# Altium PCB Part1_PCB.PcbDoc
Units mm, origin at the board's own origin, x right, y up, seen from the top; angles counter-clockwise.
Board outline 92.48 x 99.75 mm, 2 copper layers (Top Layer, Bottom Layer); 8 components, 6 nets, 45 pads, 34 vias.
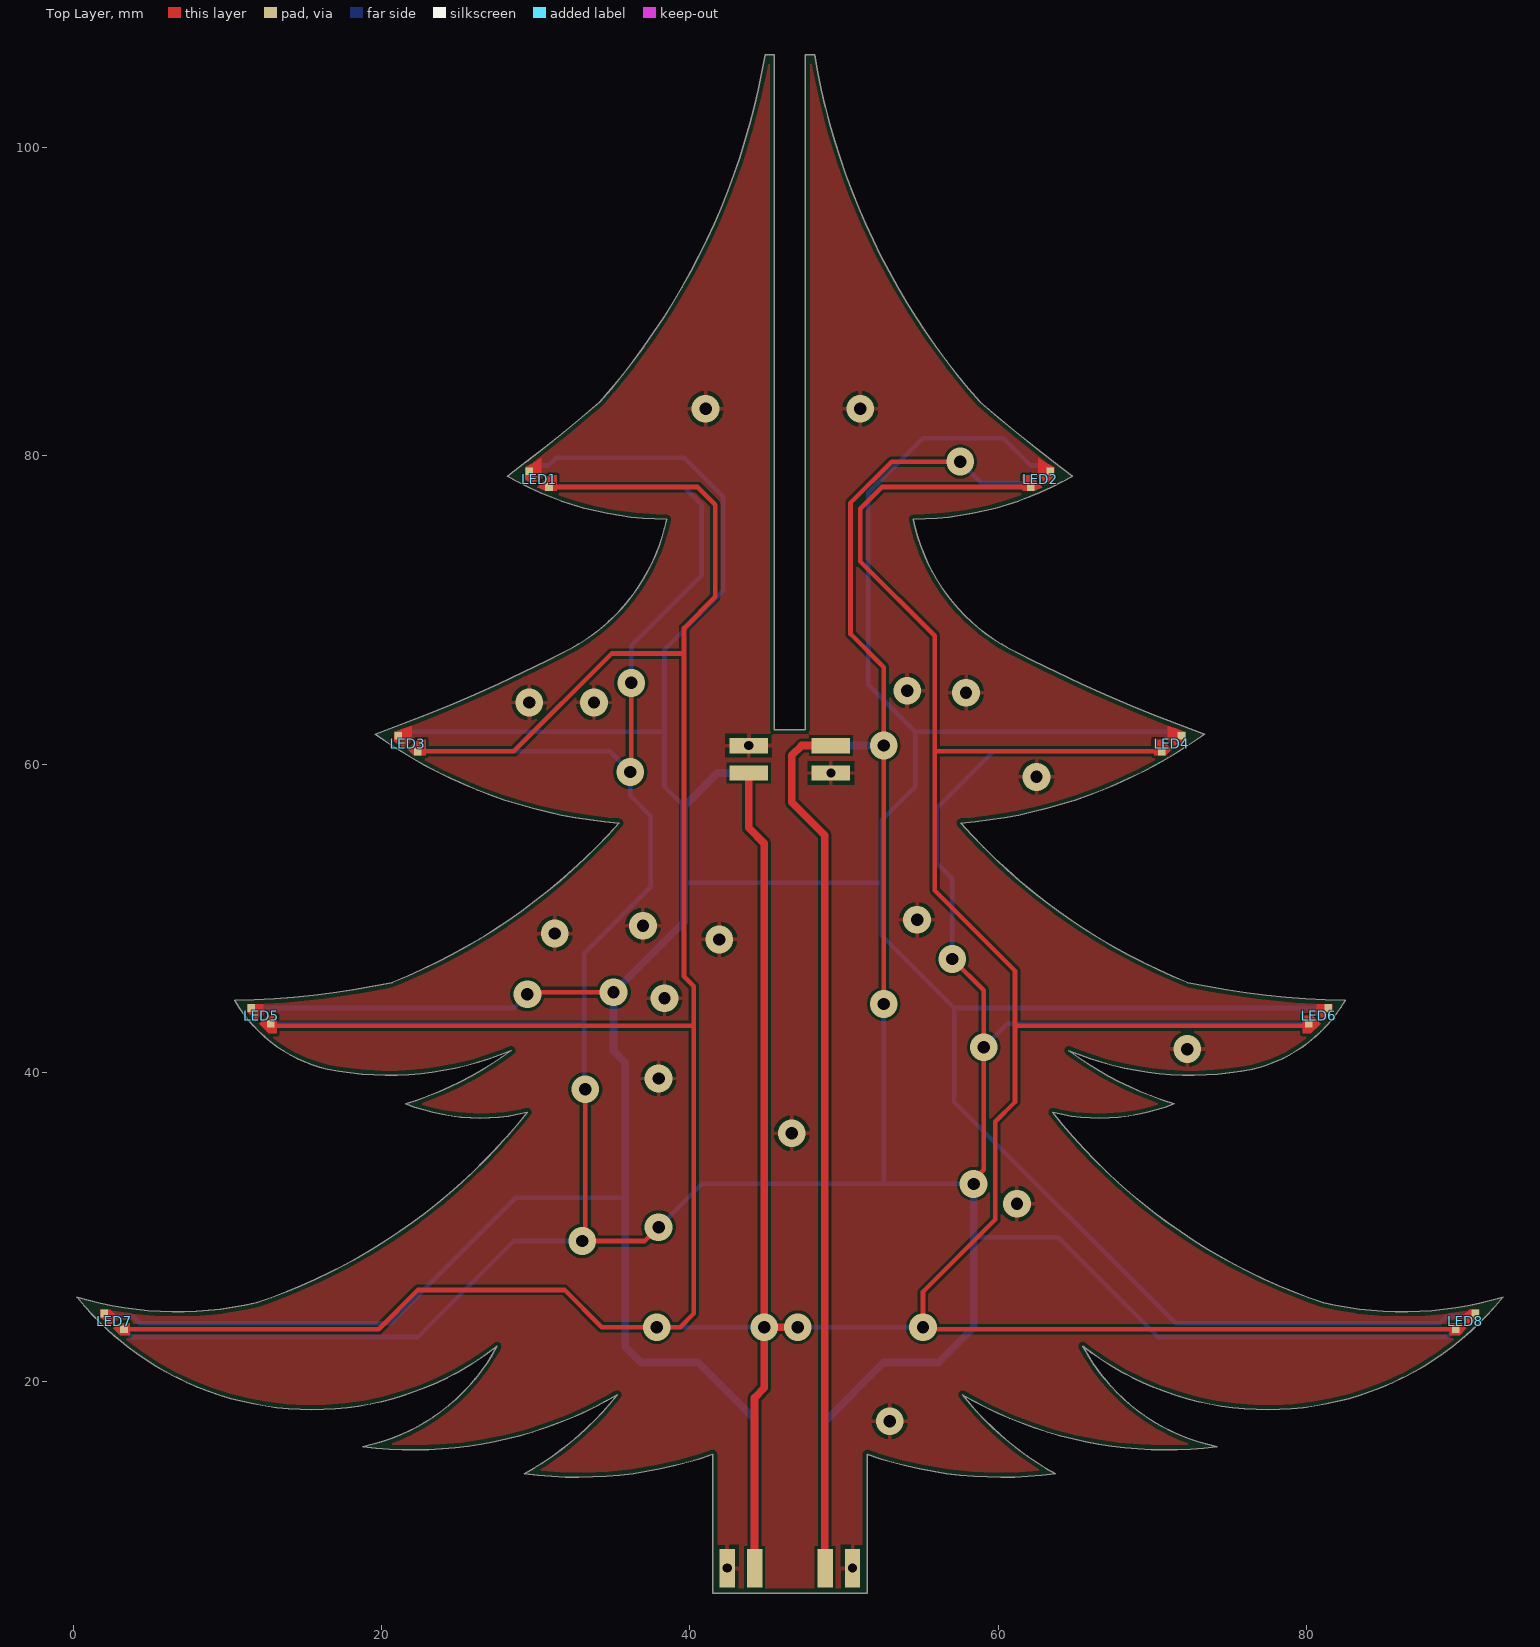
[diagram p0: Top Layer view]
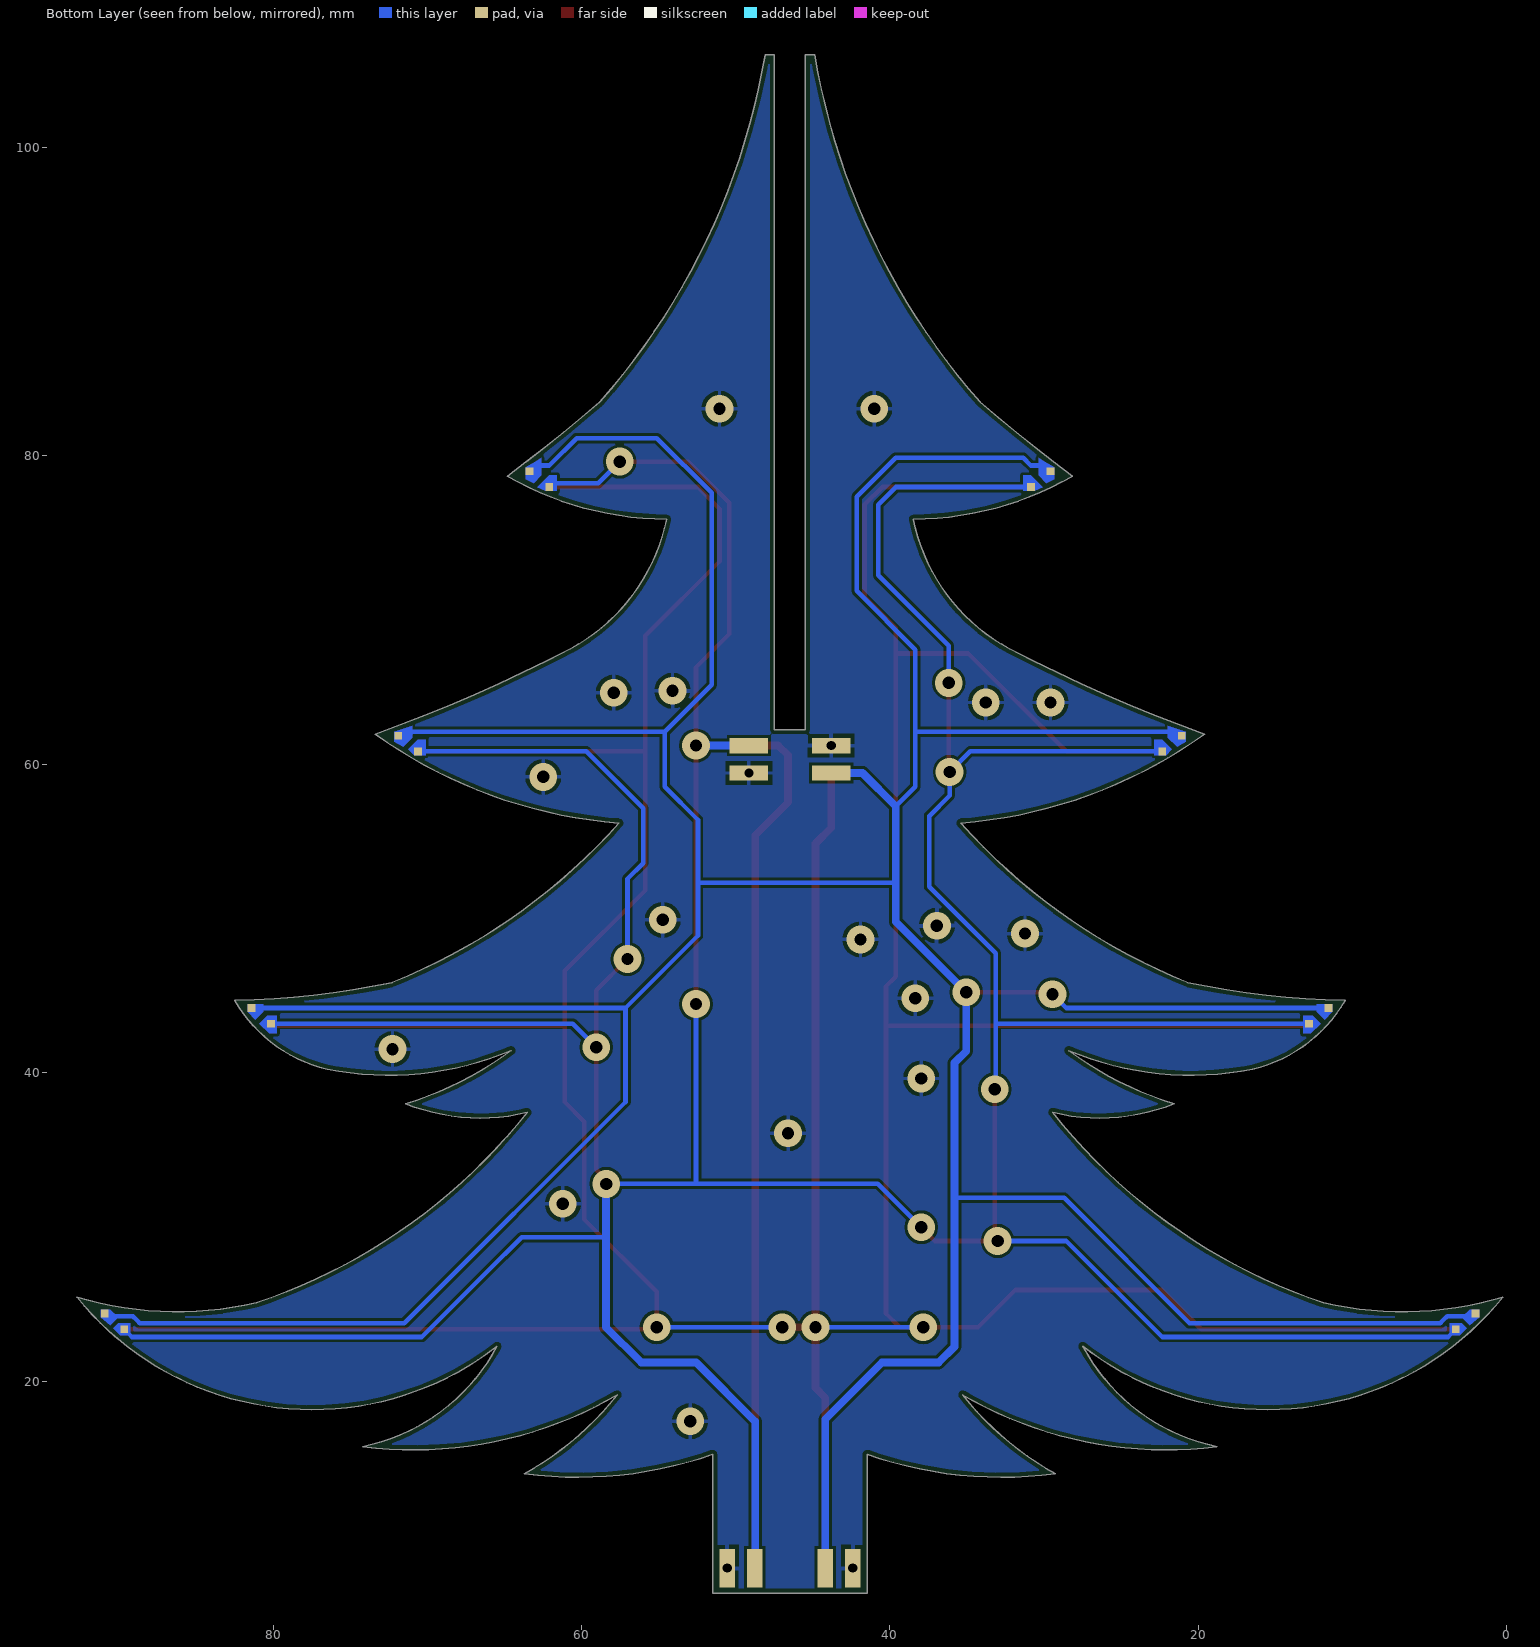
[diagram p1: Bottom Layer view, seen from below]

## Layer stack, top to bottom
Top Solder: solder mask 0.0102, Solder Resist, Dk 3.5
Top Layer: signal copper 0.0356
Dielectric 1: dielectric 0.32, FR-4, Dk 4.8
Bottom Layer: signal copper 0.0356
Bottom Solder: solder mask 0.0102, Solder Resist, Dk 3.5

## Board outline
0.25,25.447 ccw(c6.774,47.36) 11.884,25.074 ccw(c-0.116,60.815) 29.448,37.42 cw(c26.398,50.077) 21.571,37.985 ccw(c14.857,59.803) 28.411,41.435 cw(c20.471,60.239) 16.482,40.221 cw(c18.703,49.473) 10.48,44.687 ccw(c9.289,100.647) 20.685,45.847 ccw(c6.064,82.315) 35.405,56.184 cw(c37.894,87.548) 19.596,61.953 ccw(c-15.244,158.773) 32.278,67.506 ccw(c26.422,78.334) 38.488,75.898 cw(c38.543,96.629) 28.164,78.684 ccw(c-42.298,172.702) 34.154,83.486 ccw(c0.068,113.534) 44.879,106.003 45.489,106 45.489,62.25 47.489,62.25 47.489,106 48.096,106 ccw(c92.903,113.538) 58.825,83.486 ccw(c135.275,172.7) 64.814,78.684 cw(c54.435,96.629) 54.49,75.898 ccw(c66.556,78.334) 60.7,67.506 ccw(c108.223,158.773) 73.382,61.953 cw(c55.084,87.548) 57.574,56.183 ccw(c86.914,82.315) 72.293,45.847 ccw(c83.689,100.646) 82.498,44.687 cw(c74.275,49.473) 76.496,40.221 cw(c72.507,60.239) 64.567,41.435 ccw(c78.121,59.804) 71.408,37.985 cw(c66.581,50.077) 63.53,37.42 ccw(c93.095,60.815) 81.094,25.074 ccw(c86.204,47.36) 92.728,25.447 cw(c77.481,37.72) 65.489,22.25 ccw(c76.752,28.246) 74.182,15.748 cw(c70.871,41.683) 57.695,19.1 ccw(c73.306,31.397) 63.705,13.998 cw(c60.2,40.023) 51.489,15.25 51.489,6.25 41.489,6.25 41.489,15.25 cw(c32.778,40.023) 29.274,13.998 ccw(c19.672,31.397) 35.283,19.1 cw(c22.107,41.683) 18.796,15.748 ccw(c16.226,28.246) 27.489,22.25 cw(c15.498,37.72)
cut-out: 0,0 0.254,0 0.254,0.254 0,0.254

## Design rules (kind name [scope] priority, off if disabled: settings)
BoardOutlineClearance [All] p1: gap=0.2 ignorepadtopadclearanceinfootprint=FALSE
Clearance [All] p1: gap=0.2 ignorepadtopadclearanceinfootprint=FALSE
FanoutControl Fanout_LCC [All] p1 off: bgadir=Out bgaviamode=Centered fanoutstyle=Auto fanoutdirection=Alternating viagrid=0.025 // Protel DXP Scope 1 Expression Was: IsLCC   Fanout_LCC (Default Rule)
FanoutControl Fanout_BGA [All] p2 off: bgadir=Out bgaviamode=Centered fanoutstyle=Auto fanoutdirection=Alternating viagrid=0.025 // Protel DXP Scope 1 Expression Was: IsBGA   Fanout_BGA (Default Rule)
FanoutControl Fanout_SOIC [All] p3 off: bgadir=Out bgaviamode=Centered fanoutstyle=Auto fanoutdirection=Alternating viagrid=0.025 // Protel DXP Scope 1 Expression Was: IsSOIC   Fanout_SOIC (Default Rule)
FanoutControl Fanout_Default [All] p4: bgadir=Out bgaviamode=Centered fanoutstyle=Auto fanoutdirection=Alternating viagrid=0.025 // Fanout_Default (Default Rule)
FanoutControl Fanout_Small [All] p5 off: bgadir=Out bgaviamode=Centered fanoutstyle=Auto fanoutdirection=Alternating viagrid=0.025 // Protel DXP Scope 1 Expression Was: (CompPinCount < 5)   Fanout_Small (Default Rule)
PolygonConnect [All] p1: connectstyle=Relief reliefconductorwidth=0.254 reliefentries=4 polygonreliefangle="90 Angle" airgapwidth=0.254
RoutingVias [All] p1: holewidth=0.8 width=1.8 viastyle="Through Hole" minholewidth=0.8 minwidth=1.8 maxholewidth=0.8 maxwidth=1.8
SilkToSolderMaskClearance [All] p1 off: minsilkscreentomaskgap=0.254 clearancetoexposedcopper=TRUE // Protel DXP Scope 1 Expression Was: IsPad
SolderMaskExpansion [All] p1: expansion=0.102 istentingtop=FALSE
Width [All] p1: maxlimit=1 minlimit=0.3 preferedwidth=0.5
24 further rules are at their usual default settings.

## Components (designator, comment, footprint, x,y, rotation, side; value= is the part's Value field where it differs from the comment)
LED1 "1010" LED_RGB_2_LAYERS#1 29.591,78.994 r0 top
LED2 "1010" LED_RGB_2_LAYERS#2 63.373,78.994 r180 top
LED3 "1010" LED_RGB_2_LAYERS#1 21.082,61.849 r0 top
LED4 "1010" LED_RGB_2_LAYERS#2 71.882,61.849 r180 top
LED5 "1010" LED_RGB_2_LAYERS#1 11.557,44.196 r0 top
LED6 "1010" LED_RGB_2_LAYERS#2 81.407,44.196 r180 top
LED7 "1010" LED_RGB_2_LAYERS#1 2.032,24.384 r0 top
LED8 "1010" LED_RGB_2_LAYERS#2 90.932,24.384 r180 top

## Footprints (in the part's own frame and the unit in brackets; to place one, negate y for a bottom-side part, rotate by r counter-clockwise, add the part's x,y. Pads: shape width x height; smd on the part's side, far side on the other; paste and mask are expansions set on the pad)
LED_RGB_2_LAYERS#1 [mm]
  rect 0.5x0.5 smd: 1(0,0) 2(1.27,-1.016)
  rect 0.5x0.5 smd far side: 3(0,0) 4(1.27,-1.016)
LED_RGB_2_LAYERS#2 [mm]
  rect 0.5x0.5 smd: 1(0,0) 2(1.27,1.016)
  rect 0.5x0.5 smd far side: 3(0,0) 4(1.27,1.016)

## Part data
LED1 LED2 LED3 LED4 LED5 LED6 LED7 LED8: library part LED-RGB, Name=1010

## Free pads (board coordinates)
  rect 1x2.5 hole 0.6: ""(42.418,7.874) ""(50.546,7.874)
  rect 2.5x1 smd far side: ""(43.815,59.436) ""(49.149,61.214)
  rect 2.5x1 smd: ""(43.815,59.436) ""(49.149,61.214)
  rect 2.5x1 hole 0.6: ""(43.815,61.214) ""(49.149,59.436)
  rect 1x2.5 smd far side: ""(44.196,7.874) ""(48.768,7.874) ""(50.546,7.874)
  rect 1x2.5 smd: ""(44.196,7.874) ""(48.768,7.874)

## Via types
v1: diameter 1.8, hole 0.8, Top Layer to Bottom Layer, tented both sides, 34 vias

## Nets (pads, with @x,y where several pads share a name; then routed paths per layer and width w, separated by ;. In a path a pad name is that pad's centre, name@x,y a point inside that pad or via, vN(x,y) a via of type N, cw(c..) or ccw(c..) an arc to the next point about the centre after c; other vN are vias at no path point)
+5V: LED1.1 LED2.1 LED3.1 LED4.1 LED5.1 LED6.1 LED7.1 LED8.1 pad.@42.418,7.874 pad.@43.815,61.214 pad.@49.149,59.436 pad.@50.546,7.874
  other v1: 52.959,17.399 61.214,31.496 46.609,36.068 37.973,39.624 72.263,41.529 38.354,44.831 41.91,48.641 31.242,49.022 36.957,49.53 54.737,49.911 62.484,59.182 29.591,64.008 33.782,64.008 57.912,64.643 54.102,64.77 41.021,83.058 51.054,83.058
BLUE: LED1.4 LED2.4 LED3.4 LED4.4 LED5.4 LED6.4 LED7.4 LED8.4 pad.@48.768,7.874 pad.@49.149,61.214 | length 346.9
  Top Layer w0.3: v1(33.21,38.925) 33.21,29.273 v1(33.02,29.083) 37.084,29.083 v1(37.973,29.972) ; v1(36.131,59.499) 36.195,59.563 v1(36.195,65.278) ; v1(52.578,44.45) v1(52.578,61.214) 52.578,66.294 50.422,68.45 50.422,70.736 50.419,70.739 50.419,76.962 53.086,79.629 v1(57.531,79.629) ; v1(57.023,47.371) 59.055,45.339 v1(59.055,41.656) 59.055,33.711 58.401,33.057 v1(58.401,32.785)
  Bottom Layer w0.3: LED7.4 3.81,22.86 22.352,22.86 28.575,29.083 v1(33.02,29.083) ; LED5.4 33.147,43.18 ; LED3.4 34.798,60.833 v1(36.131,59.499) 36.131,57.975 37.465,56.642 37.465,52.07 33.147,47.752 33.147,43.18 ; LED1.4 39.624,77.978 40.767,76.835 40.767,72.263 36.195,67.691 v1(36.195,65.278) ; v1(33.21,38.925) 33.147,38.989 33.147,43.18 ; v1(37.973,29.972) 40.786,32.785 52.578,32.785 ; v1(52.578,44.45) 52.578,32.785 ; v1(57.023,47.371) 57.023,52.578 56.007,53.594 56.007,57.15 59.69,60.833 LED4.4 ; v1(57.531,79.629) 58.928,78.232 61.849,78.232 ; v1(58.401,32.785) 52.578,32.785 ; 58.42,29.337 63.881,29.337 66.167,27.051 70.358,22.86 89.154,22.86 LED8.4 ; v1(59.055,41.656) 60.579,43.18 LED6.4
  Bottom Layer w0.5: pad.@48.743,8 48.743,17.374 52.578,21.209 56.134,21.209 58.42,23.495 58.42,29.337 58.42,32.766 v1(58.401,32.785) ; pad.@49.149,61.214 v1(52.578,61.214)
GND: 
GREEN: LED1.2 LED2.2 LED3.2 LED4.2 LED5.2 LED6.2 LED7.2 LED8.2 pad.@43.815,59.436 pad.@44.196,7.874 | length 360.8
  Top Layer w0.3: LED7.2 19.812,23.368 22.352,25.908 31.877,25.908 34.29,23.495 v1(37.846,23.495) 39.37,23.495 40.259,24.384 40.259,45.593 39.624,46.228 39.624,67.183 ; LED5.2 12.927,43.08 13.076,43.08 13.103,43.053 40.132,43.053 ; LED3.2 28.575,60.833 34.925,67.183 39.624,67.183 ; LED1.2 40.513,77.978 41.656,76.835 41.656,70.866 39.624,68.834 39.624,67.183 ; LED2.2 52.451,77.978 51.054,76.581 51.054,73.152 55.88,68.326 55.88,60.833 ; LED4.2 55.88,60.833 ; LED6.2 80.037,43.08 79.888,43.08 79.861,43.053 61.087,43.053 ; LED8.2 55.245,23.368 v1(55.118,23.495) 55.118,25.781 59.817,30.48 59.817,36.83 61.087,38.1 61.087,43.053 ; 55.88,60.833 55.88,51.816 61.087,46.609 61.087,43.053
  Top Layer w0.5: pad.@43.815,59.436 43.815,55.88 44.831,54.864 v1(44.831,23.495) ; pad.@44.196,7.874 44.196,18.923 44.831,19.558 v1(44.831,23.495) ; v1(46.99,23.495) v1(44.831,23.495)
  Bottom Layer w0.3: v1(37.846,23.495) v1(44.831,23.495) ; v1(46.99,23.495) v1(55.118,23.495)
RED: LED1.3 LED2.3 LED3.3 LED4.3 LED5.3 LED6.3 LED7.3 LED8.3 pad.@43.815,59.436 pad.@44.196,7.874 | length 328.9
  Top Layer w0.3: v1(29.464,45.085) 29.591,45.212 v1(35.052,45.212)
  Bottom Layer w0.3: LED7.3 2.132,24.284 2.259,24.284 2.415,24.128 2.664,24.128 2.735,24.199 3.869,24.199 4.133,23.935 4.133,23.934 4.318,23.749 20.574,23.749 28.702,31.877 35.814,31.877 ; LED5.3 28.575,44.196 v1(29.464,45.085) ; LED3.3 21.717,61.849 21.971,62.103 38.354,62.103 ; 29.845,79.121 30.099,79.375 30.861,79.375 31.369,79.883 39.624,79.883 42.164,77.343 42.164,71.247 38.354,67.437 38.354,62.103 ; 39.624,52.324 52.451,52.324 ; 39.624,57.277 38.354,58.547 38.354,62.103 ; 63.119,79.121 62.865,79.375 62.103,79.375 60.325,81.153 55.118,81.153 51.562,77.597 51.562,65.151 54.61,62.103 ; LED4.3 71.247,61.849 70.993,62.103 54.61,62.103 ; LED6.3 57.15,44.196 ; LED8.3 90.832,24.284 90.705,24.284 90.549,24.128 90.3,24.128 90.229,24.199 89.095,24.199 88.831,23.935 88.831,23.934 88.646,23.749 71.501,23.749 57.15,38.1 57.15,44.196 ; 52.451,52.324 52.451,56.388 54.61,58.547 54.61,62.103 ; 52.451,52.324 52.451,48.895 57.15,44.196
  Bottom Layer w0.5: pad.@43.815,59.436 41.783,59.436 39.624,57.277 39.624,52.324 39.624,49.784 v1(35.052,45.212) 35.052,41.402 35.814,40.64 35.814,31.877 35.814,22.225 36.83,21.209 40.513,21.209 44.196,17.526 pad.@44.196,7.874
STAR: pad.@48.768,7.874 pad.@49.149,61.214 | length 56.3
  Top Layer w0.5: pad.@48.743,8 48.743,55.397 46.609,57.531 46.609,60.579 47.244,61.214 pad.@49.149,61.214

## Polygon pours and split planes (outlines as drawn)
+5V on Bottom Layer "+5V_L02_P000" (solid, pour order 0): 0.25,25.447 ccw(c6.774,47.36) 11.884,25.074 ccw(c-0.116,60.815) 29.448,37.42 cw(c26.398,50.077) 21.571,37.985 ccw(c14.857,59.803) 28.411,41.435 cw(c20.471,60.239) 16.482,40.221 cw(c18.703,49.473) 10.48,44.687 ccw(c9.289,100.647) 20.685,45.847 ccw(c6.064,82.315) 35.405,56.184 cw(c37.894,87.548) 19.596,61.953 ccw(c-15.244,158.772) 32.278,67.506 ccw(c26.422,78.334) 38.488,75.898 cw(c38.543,96.629) 28.164,78.684 ccw(c-42.298,172.702) 34.154,83.486 ccw(c0.068,113.534) 45.489,112.25 45.489,62.25 47.489,62.25 47.489,112.25 ccw(c92.91,113.534) 58.825,83.486 ccw(c135.276,172.701) 64.814,78.684 cw(c54.435,96.629) 54.49,75.898 ccw(c66.556,78.334) 60.7,67.506 ccw(c108.223,158.773) 73.382,61.953 cw(c55.084,87.548) 57.574,56.183 ccw(c86.914,82.315) 72.293,45.847 ccw(c83.69,100.647) 82.498,44.687 cw(c74.275,49.473) 76.496,40.221 cw(c72.507,60.239) 64.567,41.435 ccw(c78.121,59.804) 71.408,37.985 cw(c66.581,50.077) 63.53,37.42 ccw(c93.095,60.815) 81.094,25.074 ccw(c86.204,47.36) 92.728,25.447 cw(c77.481,37.72) 65.489,22.25 ccw(c76.752,28.246) 74.182,15.748 cw(c70.871,41.683) 57.695,19.1 ccw(c73.306,31.397) 63.705,13.998 cw(c60.2,40.023) 51.489,15.25 51.489,6.25 41.489,6.25 41.489,15.25 cw(c32.778,40.023) 29.274,13.998 ccw(c19.672,31.397) 35.283,19.1 cw(c22.107,41.683) 18.796,15.748 ccw(c16.226,28.246) 27.489,22.25 cw(c15.498,37.72)
+5V on Top Layer "+5V_L01_P001" (solid, pour order 1): 0.25,25.447 ccw(c6.774,47.36) 11.884,25.074 ccw(c-0.116,60.815) 29.448,37.42 cw(c26.398,50.077) 21.571,37.985 ccw(c14.857,59.803) 28.411,41.435 cw(c20.471,60.239) 16.482,40.221 cw(c18.703,49.473) 10.48,44.687 ccw(c9.289,100.647) 20.685,45.847 ccw(c6.064,82.315) 35.405,56.184 cw(c37.894,87.548) 19.596,61.953 ccw(c-15.244,158.772) 32.278,67.506 ccw(c26.422,78.334) 38.488,75.898 cw(c38.543,96.629) 28.164,78.684 ccw(c-42.298,172.702) 34.154,83.486 ccw(c0.068,113.534) 45.489,112.25 45.489,62.25 47.489,62.25 47.489,112.25 ccw(c92.91,113.534) 58.825,83.486 ccw(c135.276,172.701) 64.814,78.684 cw(c54.435,96.629) 54.49,75.898 ccw(c66.556,78.334) 60.7,67.506 ccw(c108.223,158.773) 73.382,61.953 cw(c55.084,87.548) 57.574,56.183 ccw(c86.914,82.315) 72.293,45.847 ccw(c83.69,100.647) 82.498,44.687 cw(c74.275,49.473) 76.496,40.221 cw(c72.507,60.239) 64.567,41.435 ccw(c78.121,59.804) 71.408,37.985 cw(c66.581,50.077) 63.53,37.42 ccw(c93.095,60.815) 81.094,25.074 ccw(c86.204,47.36) 92.728,25.447 cw(c77.481,37.72) 65.489,22.25 ccw(c76.752,28.246) 74.182,15.748 cw(c70.871,41.683) 57.695,19.1 ccw(c73.306,31.397) 63.705,13.998 cw(c60.2,40.023) 51.489,15.25 51.489,6.25 41.489,6.25 41.489,15.25 cw(c32.778,40.023) 29.274,13.998 ccw(c19.672,31.397) 35.283,19.1 cw(c22.107,41.683) 18.796,15.748 ccw(c16.226,28.246) 27.489,22.25 cw(c15.498,37.72)

## Other copper
Top Layer:
  region net +5V: 81.661,44.45 81.661,43.942 81.165,43.446 80.645,43.942 80.645,44.45 80.899,44.45
  region net +5V: 91.186,24.638 91.186,24.13 90.551,23.622 90.043,24.13 90.551,24.638
  region net GREEN: 71.247,60.96 70.866,60.579 70.104,60.579 70.104,61.595 70.612,61.595
  region net GREEN: 90.361,23.431 89.916,22.987 89.281,22.987 89.281,23.749 90.043,23.749
  region net GREEN: 62.865,77.978 62.357,77.724 61.595,77.724 61.595,78.74 62.103,78.74
  region net +5V: 63.627,79.248 63.627,78.486 63.113,78.226 62.6,78.74 62.6,79.864 62.992,79.629
  region net +5V: 72.136,62.103 72.136,61.468 71.58,61.135 70.993,61.722 70.993,62.484 71.374,62.357
  region net GREEN: 80.899,43.18 80.264,42.545 79.756,42.545 79.756,43.688 80.391,43.688
  region net GREEN: 21.717,60.96 22.098,60.579 22.86,60.579 22.86,61.595 22.352,61.595
  region net GREEN: 2.603,23.431 3.048,22.987 3.683,22.987 3.683,23.749 2.921,23.749
  region net +5V: 1.778,24.638 1.778,24.13 2.413,23.622 2.921,24.13 2.413,24.638
  region net GREEN: 30.099,77.978 30.607,77.724 31.369,77.724 31.369,78.74 30.861,78.74
  region net +5V: 29.337,79.248 29.337,78.486 29.851,78.226 30.364,78.74 30.364,79.864 29.972,79.629
  region net +5V: 20.828,62.103 20.828,61.468 21.384,61.135 21.971,61.722 21.971,62.484 21.59,62.357
  region net +5V: 11.303,44.45 11.303,43.942 11.799,43.446 12.319,43.942 12.319,44.45 12.065,44.45
  region net GREEN: 12.065,43.18 12.7,42.545 13.208,42.545 13.208,43.688 12.573,43.688
Bottom Layer:
  region net BLUE: 21.717,60.96 22.098,60.579 22.86,60.579 22.86,61.595 22.352,61.595
  region net RED: 20.828,62.103 20.828,61.468 21.384,61.135 21.971,61.722 21.971,62.484 21.59,62.357
  region net RED: 81.661,44.45 81.661,43.942 81.165,43.446 80.645,43.942 80.645,44.45 80.899,44.45
  region net RED: 91.186,24.638 91.186,24.13 90.551,23.622 90.043,24.13 90.551,24.638
  region net RED: 63.627,79.248 63.627,78.486 63.113,78.226 62.6,78.74 62.6,79.864 62.992,79.629
  region net BLUE: 80.899,43.18 80.264,42.545 79.756,42.545 79.756,43.688 80.391,43.688
  region net RED: 72.136,62.103 72.136,61.468 71.58,61.135 70.993,61.722 70.993,62.484 71.374,62.357
  region net BLUE: 62.865,77.978 62.357,77.724 61.595,77.724 61.595,78.74 62.103,78.74
  region net BLUE: 71.247,60.96 70.866,60.579 70.104,60.579 70.104,61.595 70.612,61.595
  region net BLUE: 90.361,23.431 89.916,22.987 89.281,22.987 89.281,23.749 90.043,23.749
  region net BLUE: 2.603,23.431 3.048,22.987 3.683,22.987 3.683,23.749 2.921,23.749
  region net RED: 11.303,44.45 11.303,43.942 11.799,43.446 12.319,43.942 12.319,44.45 12.065,44.45
  region net RED: 1.778,24.638 1.778,24.13 2.413,23.622 2.921,24.13 2.413,24.638
  region net RED: 29.337,79.248 29.337,78.486 29.851,78.226 30.364,78.74 30.364,79.864 29.972,79.629
  region net BLUE: 30.099,77.978 30.607,77.724 31.369,77.724 31.369,78.74 30.861,78.74
  region net BLUE: 12.065,43.18 12.7,42.545 13.208,42.545 13.208,43.688 12.573,43.688

## Silkscreen, mask and mechanical layers (free items; w line width, h text height)
Top Overlay:
  region: 45.489,106 45.486,106.003 44.879,106.003
Board:
  the board outline again, w0.5